# Altium PCB pcb.PcbDoc
Units mm, origin at the board's own origin, x right, y up, seen from the top; angles counter-clockwise.
Board outline 31.11 x 20.07 mm, 2 copper layers (Top Layer, Bottom Layer); 13 components, 12 nets, 44 pads, 2 vias.
Unrouted connection lines stored in the file: 1.
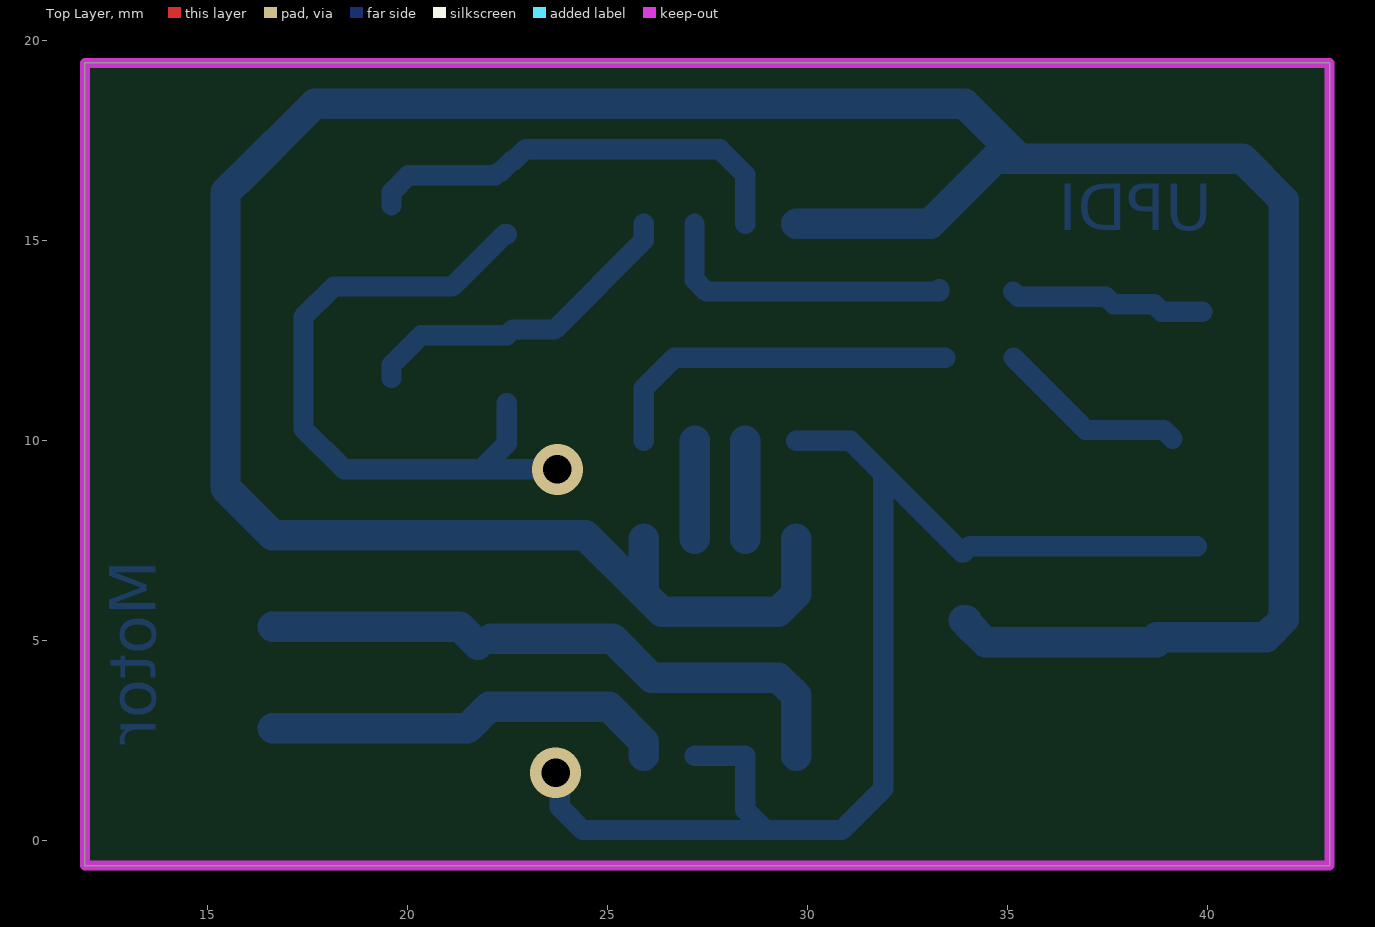
[diagram p0: Top Layer view]
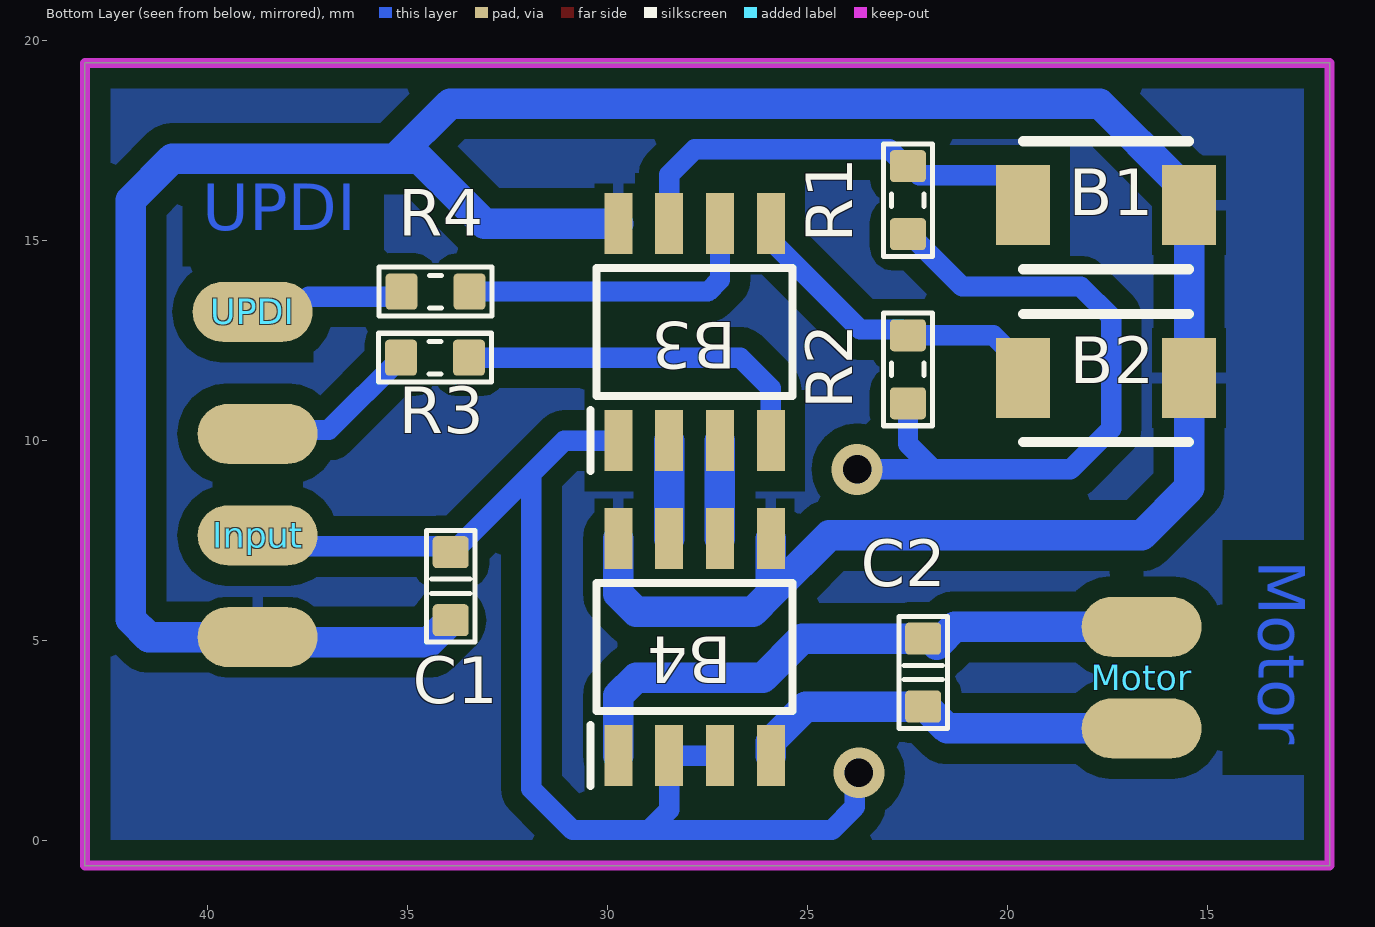
[diagram p1: Bottom Layer view, seen from below]
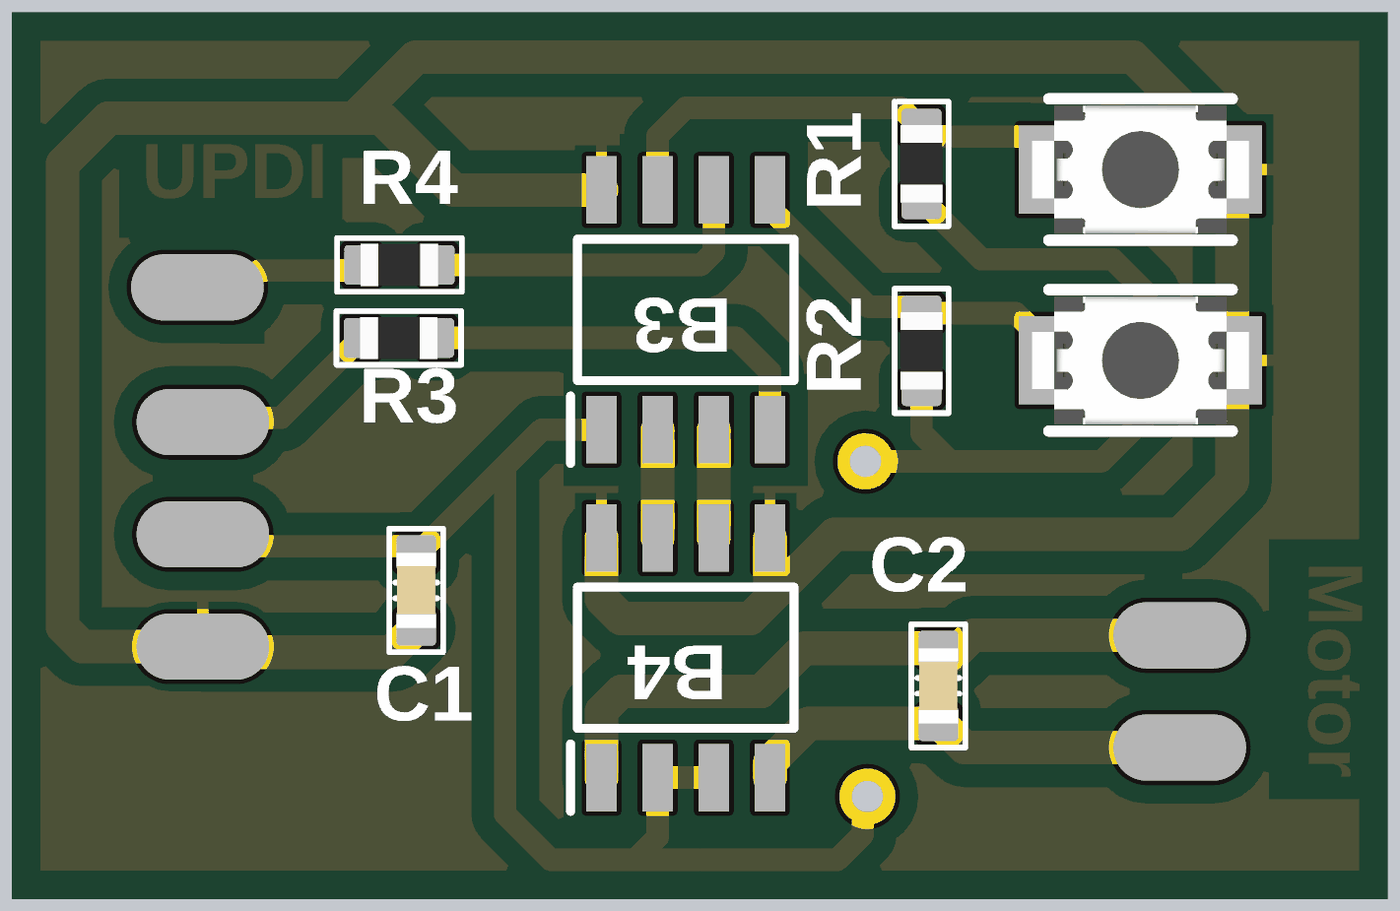
[diagram p2: 3D render of the assembled board from below, using the file's embedded part models]

## Layer stack, top to bottom
Top Solder: solder mask 0.0102, Solder Resist, Dk 3.5
Top Layer: signal copper 0.0356
Dielectric 1: dielectric 0.32, FR-4, Dk 4.8
Bottom Layer: signal copper 0.0356
Bottom Solder: solder mask 0.0102, Solder Resist, Dk 3.5

## Board outline
11.938,-0.635 11.938,19.431 43.053,19.431 43.053,-0.635

## Design rules (kind name [scope] priority, off if disabled: settings)
Clearance [All] p1: gap=0.508 ignorepadtopadclearanceinfootprint=FALSE except(0: Arc-Hole Track-Hole SMDPad-Hole THPad-Hole Via-Hole Fill-Hole Poly-Hole Region-Hole Text-Hole)
PolygonConnect [All] p1: connectstyle=Relief reliefconductorwidth=0.254 reliefentries=4 polygonreliefangle="90 Angle" airgapwidth=0.254
RoutingVias [All] p1: holewidth=0.711 width=1.27 viastyle="Through Hole" minholewidth=0.711 minwidth=1.27 maxholewidth=0.711 maxwidth=1.27
SolderMaskExpansion [All] p1: expansion=0.102 istentingtop=FALSE
Width [All] p1: maxlimit=0.762 minlimit=0.381 preferedwidth=0.508
30 further rules are at their usual default settings.

## Components (designator, comment, footprint, x,y, rotation, side; value= is the part's Value field where it differs from the comment)
B1 "BUTTON" "BUTTON 3x4x2" 17.526,15.875 r0 bottom
B2 "BUTTON" "BUTTON 3x4x2" 17.526,11.557 r0 bottom
B3 "ATTINY202-SSNR" SOIC127P600X175-8N 27.813,12.7 r90 bottom
B4 "L9110S" SOIC127P600X175-8N 27.813,4.826 r90 bottom
C1 "104" "CAP 0603" 33.909,6.35 r90 bottom
C2 "104" "CAP 0603" 22.098,4.191 r90 bottom
Input "Pad_3" Pad_3_2.54 38.735,7.62 r270 bottom
Motor "Pad_2" PAD_2_2.54 16.637,4.064 r270 bottom
R1 "1K" "RES 0603" 22.479,16.014 r270 bottom
R2 "1K" "RES 0603" 22.479,11.784 r270 bottom
R3 "4.7k" "RES 0603" 34.29,12.065 r0 bottom
R4 "100" "RES 0603" 34.302,13.716 r180 bottom
UPDI "TEST" TEST 38.86,13.208 r270 bottom

## Footprints (in the part's own frame and the unit in brackets; to place one, negate y for a bottom-side part, rotate by r counter-clockwise, add the part's x,y. Pads: shape width x height; smd on the part's side, far side on the other; paste and mask are expansions set on the pad)
"BUTTON 3x4x2" [mm]
  rect 1.35x2 smd: 1(2.075,0) 2(-2.075,0)
  silkscreen extent -2.07,-1.6 2.07,1.6, body extent -2.45,-1.45 2.45,1.45, height 2.01
"CAP 0603" [mm]
  round 0.254 on Mech15: 0(0,0)
  rrect25% 0.8x0.9 smd: 1(0.85,0) 2(-0.85,0)
  silkscreen extent -1.4,-0.61 1.4,0.61, body extent -0.85,-0.45 0.85,0.45, height 0.89
PAD_2_2.54 [mm]
  oval 1.5x3 smd: 1(-1.27,0) 2(1.27,0)
Pad_3_2.54 [mm]
  oval 1.5x3 smd: 1(-2.54,0) 2(0,0) 3(2.54,0)
"RES 0603" [mm]
  round 0.254 on Mech15: 0(0.012,0)
  rrect25% 0.8x0.9 smd: 1(0.862,0) 2(-0.838,0)
  silkscreen extent -1.4,-0.61 1.42,0.61, body extent -0.86,-0.47 0.89,0.48, height 0.54
SOIC127P600X175-8N [mm]
  rect 1.525x0.7 smd: 1(-2.712,1.905) 2(-2.712,0.635) 3(-2.712,-0.635) 4(-2.712,-1.905) 5(2.712,-1.905) 6(2.712,-0.635) 7(2.712,0.635) 8(2.712,1.905)
  silkscreen extent -3.47,-2.45 1.6,2.61
TEST [mm]
  oval 1.5x3 smd: 1(0,0)

## Part data
B3: "8-bit Microcontrollers - MCU 20MHz, 2KB, SOIC8, Ind 105C, Green, T&R", Manufacturer_Name=Microchip, Mouser Part Number=579-ATTINY202-SSNR, Arrow Part Number=ATTINY202-SSNR, Arrow Price/Stock=https://www.arrow.com/en/products/attiny202-ssnr/microchip-technology?utm_currency=USD&region=nac, Datasheet Link=http://ww1.microchip.com/downloads/en/DeviceDoc/ATtiny202-402-AVR-MCU-with-Core-Independent-Peripherals_and-picoPower-40001969A.pdf, Geometry.Height=1.75mm, Manufacturer_Part_Number=ATTINY202-SSNR, Mouser Price/Stock=https://www.mouser.co.uk/ProductDetail/Microchip-Technology/ATTINY202-SSNR?qs=y6ZabgHbY%252Bx90fzudZ0SuA%3D%3D
B4: "Motor Drivers SOP-8_150mil RoHS", Manufacturer_Name="Wuxi I-core Elec", Datasheet Link=https://datasheet.lcsc.com/szlcsc/Wuxi-Zhongwei-Aisin-Elec-L9110S_C85174.pdf, Geometry.Height=1.75mm, Manufacturer_Part_Number=L9110S
C1 C2: library part CAP
R1 R2 R3 R4: library part RES
UPDI: library part Test_Point

## Via types
v1: diameter 1.27, hole 0.711, Top Layer to Bottom Layer, 2 vias

## Nets (pads, with @x,y where several pads share a name; then routed paths per layer and width w, separated by ;. In a path a pad name is that pad's centre, name@x,y a point inside that pad or via, vN(x,y) a via of type N, cw(c..) or ccw(c..) an arc to the next point about the centre after c; other vN are vias at no path point)
5V: B3.1 B4.2 B4.3 C1.1 Input.2 R1.1 R2.1 | length 49.7
  Top Layer w0.508: v1(23.703,1.686) v1@23.849,1.832
  Bottom Layer w0.508: R2.1 22.479,9.906 21.844,9.271 ; R1.1 22.429,15.152 21.12,13.843 18.161,13.843 17.399,13.081 17.399,10.287 18.415,9.271 21.844,9.271 ; v1(23.703,1.686) 23.807,1.582 23.807,0.831 24.384,0.254 28.956,0.254 ; v1(23.749,9.271) 21.844,9.271 ; B4.3 B4.2 28.448,0.762 28.956,0.254 ; B3.1 31.071,9.988 31.896,9.163 ; Input.2@39.731,7.346 34.055,7.346 C1.1 33.859,7.2 31.896,9.163 ; 28.956,0.254 30.861,0.254 31.896,1.289 31.896,9.163
BTN1: B1.1 B3.7 R1.2 | length 11.1
  Bottom Layer w0.508: B1.1 19.601,16.2 20.022,16.621 22.198,16.621 22.283,16.706 22.333,16.706 22.625,16.998 22.675,16.998 22.949,17.272 27.813,17.272 28.448,16.637 B3.7
BTN2: B2.1 B3.5 R2.2 | length 8.3
  Bottom Layer w0.508: B2.1 19.601,11.882 20.341,12.622 R2.2 22.625,12.768 23.677,12.768 25.908,15 B3.5
GND: B1.2 B2.2 B3.8 B4.5 B4.8 C1.2 Input.3 | length 79.4
  Bottom Layer w0.762: B4.5 25.908,6.161 ; B4.8 29.718,6.161 29.272,5.715 26.354,5.715 25.908,6.161 ; B3.8 33.065,15.412 34.688,17.035 35.306,17.035 ; C1.2 33.959,5.5 33.978,5.481 33.978,5.431 34.456,4.953 Input.3@38.735,4.953 ; Input.3 41.464,5.08 41.91,5.526 41.91,16.002 40.877,17.035 35.306,17.035 ; 25.908,6.161 24.449,7.62 16.637,7.62 15.451,8.806 B2.2 15.451,16.2 15.745,16.494 15.764,16.494 17.685,18.415 33.926,18.415 35.306,17.035
IN1: B3.2 B4.7 | length 2.4
  Bottom Layer w0.762: B4.7 B3.2
IN2: B3.3 B4.6 | length 2.4
  Bottom Layer w0.762: B4.6 B3.3
NetB3_4: B3.4 R3.2 | length 9.2
  Bottom Layer w0.508: B3.4 25.908,11.303 26.67,12.065 R3.2
NetB3_6: B3.6 R4.1 | length 7.7
  Bottom Layer w0.508: B3.6 27.178,14.014 27.476,13.716 33.294,13.716 33.296,13.718 R4.1@33.296,13.776
NetB4_1: B4.1 C2.1 Motor.1 | length 15
  Bottom Layer w0.762: Motor.1 21.312,5.334 C2.1@21.755,4.891 ; C2.1 25.128,5.041 26.105,4.064 29.272,4.064 29.718,3.618 B4.1
NetB4_4: B4.4 C2.2 Motor.2 | length 10.2
  Bottom Layer w0.762: Motor.2 21.501,2.794 22.048,3.341 25.031,3.341 25.908,2.464 B4.4
NetR4_2: R4.2 UPDI.1 | length 4.9
  Bottom Layer w0.508: R4.2 35.267,13.589 37.46,13.589 37.651,13.398 38.67,13.398 UPDI.1 UPDI.1@39.878,13.208
Pulse_Input: Input.1 R3.1 | length 4.8
  Bottom Layer w0.508: R3.1 36.96,10.257 38.904,10.257 Input.1@39.128,10.033
pads on no net: C1.0 C2.0 R1.0 R2.0 R3.0 R4.0

## Polygon pours and split planes (outlines as drawn)
GND on Bottom Layer "GND_L02_P000" (solid, pour order 0): 11.938,-0.635 11.938,19.431 43.053,19.431 43.053,-0.635

## Keep-outs
Keep-Out Layer:
  the board outline again, w0.254